# Altium PCB loaptrung.PcbDoc
Units mm, origin at the board's own origin, x right, y up, seen from the top; angles counter-clockwise.
Board outline 113.14 x 67.92 mm, 2 copper layers (Top Layer, Bottom Layer); 18 components, 19 nets, 82 pads, 2 vias.
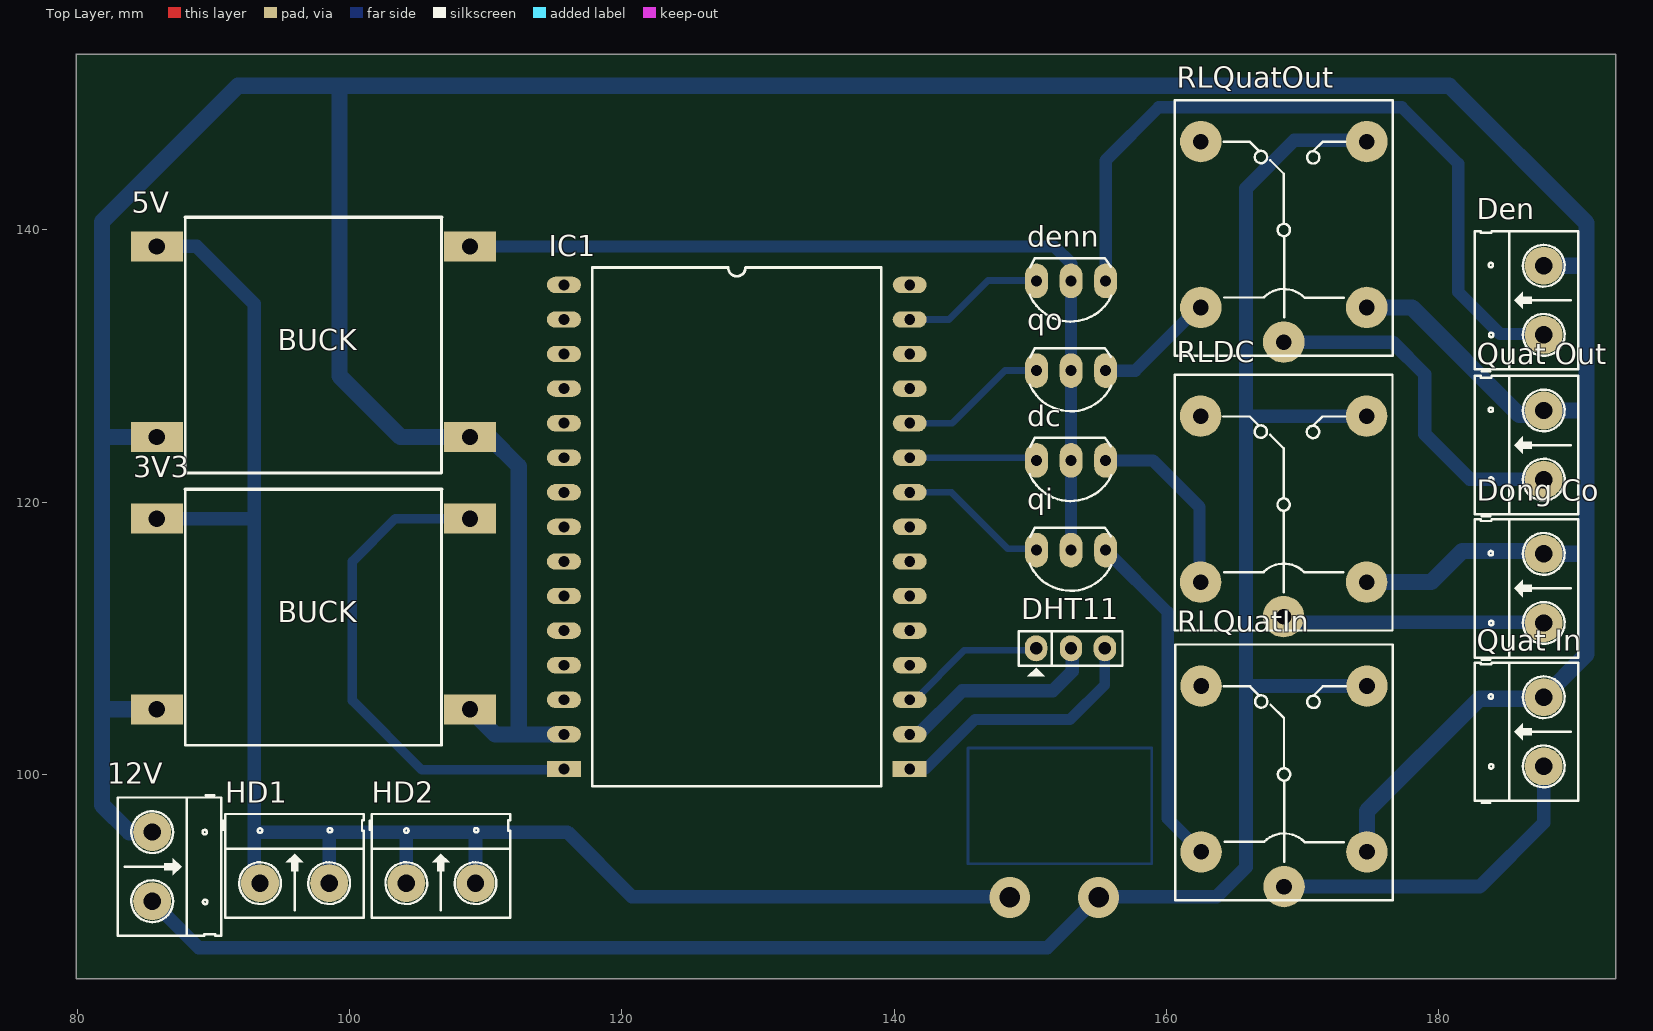
[diagram p0: Top Layer view]
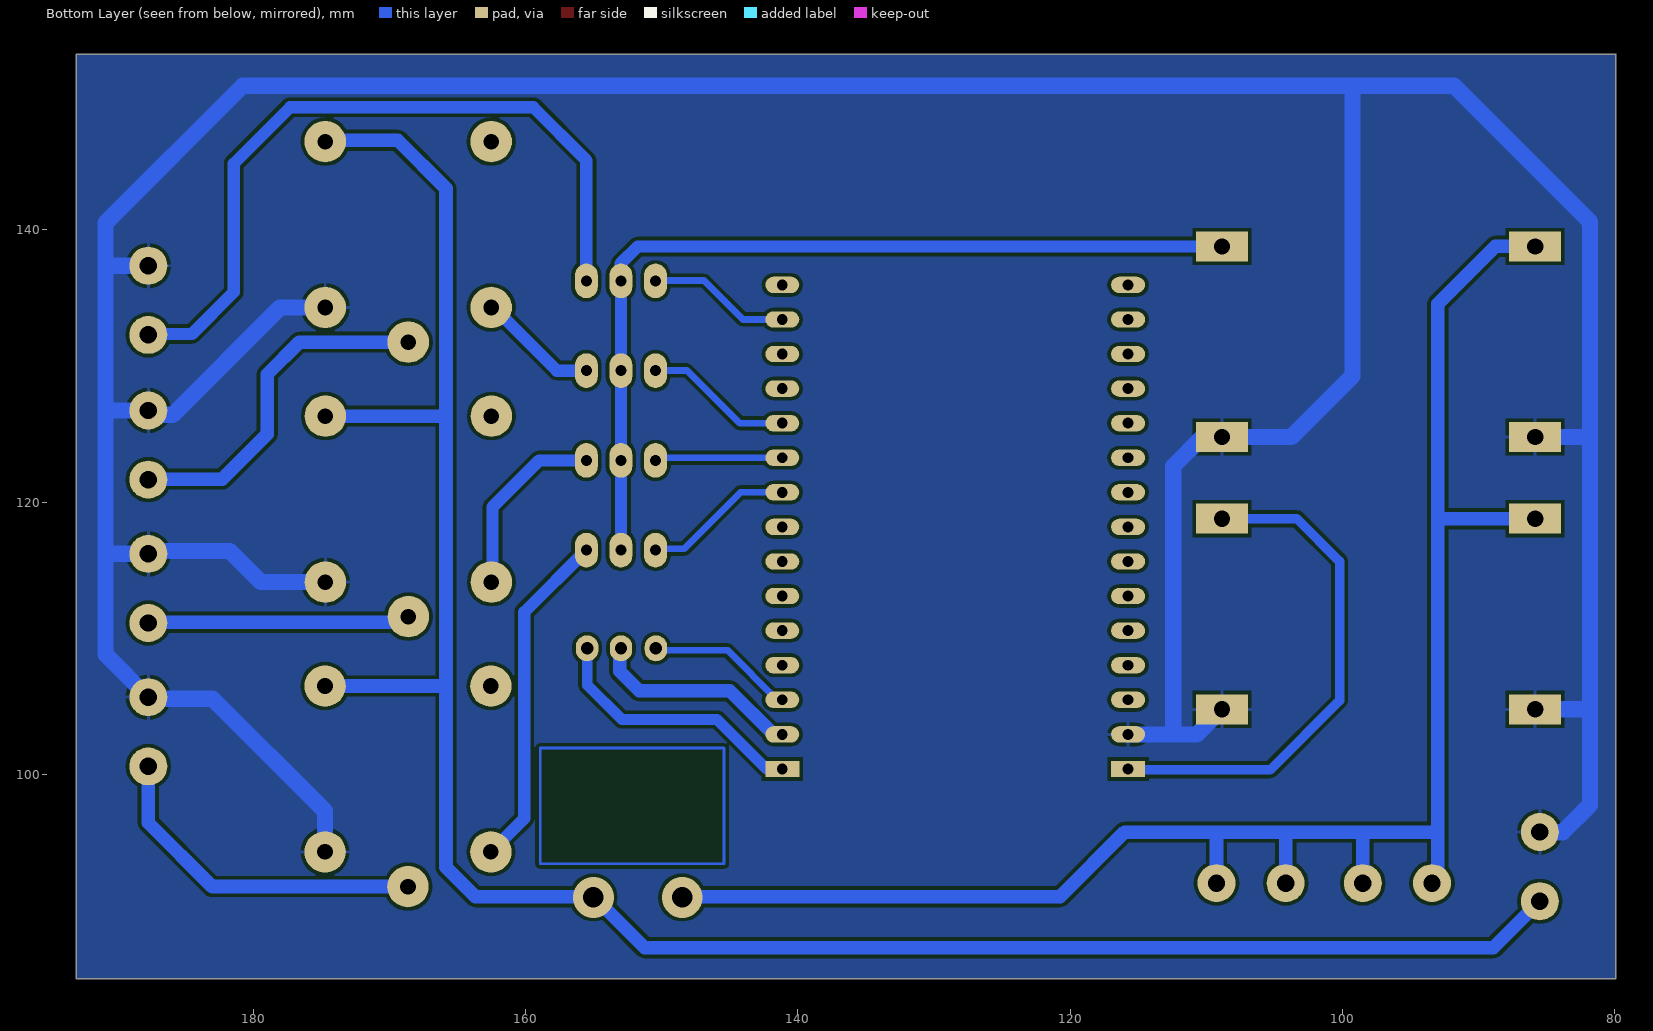
[diagram p1: Bottom Layer view, seen from below]
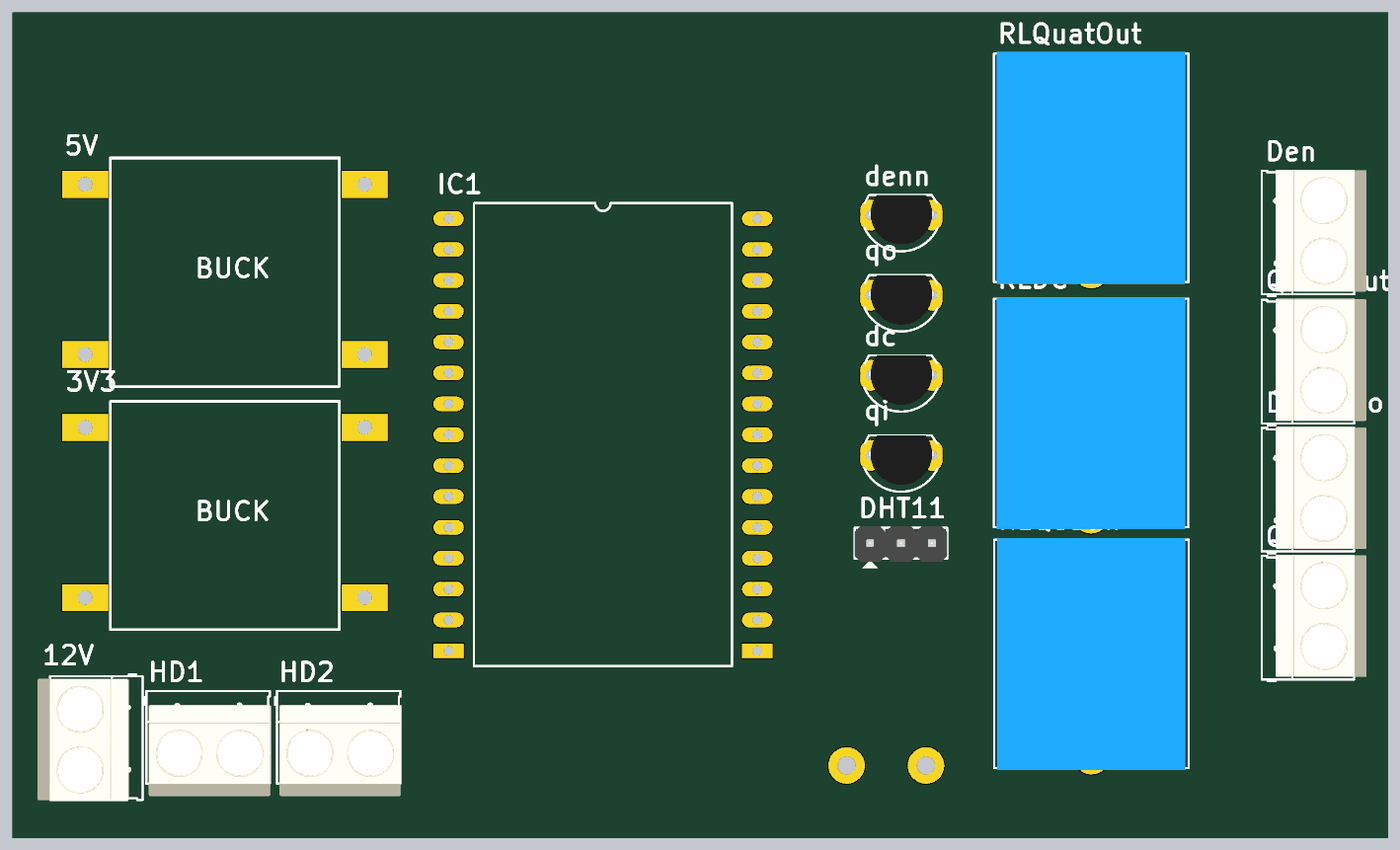
[diagram p2: 3D render of the assembled board from above, using the file's embedded part models]

## Layer stack, top to bottom
Top Layer: signal copper 0.0356
Dielectric: dielectric 0.32, FR-4, Dk 4.8
Bottom Layer: signal copper 0.0356

## Board outline
79.907,152.908 79.902,152.903 79.902,84.994 193.037,84.994 193.033,84.998 193.033,85.197 193.033,152.912 193.03,152.909 79.902,152.909 79.902,152.903

## Design rules (kind name [scope] priority, off if disabled: settings)
Clearance [All] p1: gap=0.254
PolygonConnect [All] p1: connectstyle=Relief reliefconductorwidth=0.254 reliefentries=4 polygonreliefangle="90 Angle"
RoutingCorners [All] p1: cornerstyle=45-Degree minsetback=3 maxsetback=3
RoutingLayers [All] p1: top layer_v5=FALSE bottom layer_v5=TRUE
RoutingVias [All] p1: holewidth=0.711 width=1.27 viastyle="Through Hole" minholewidth=0.711 minwidth=1.27 maxholewidth=0.711 maxwidth=1.27
SilkscreenOverComponentPads SilkToSolderMaskClearance [IsPad] p1: minsilkscreentomaskgap=0.254
SolderMaskExpansion [All] p1: expansion=0.102
TestPointUsage FabricationTestPointUsage [All] p1: valid=0 allowmultiple=FALSE
Testpoint FabricationTestpoint [(IsPad And (OnTopLayer Or OnBottomLayer))] p1: side=3 testpointundercomponent=TRUE minsize=1.016 maxsize=2.54 preferedsize=1.524 minholesize=0 maxholesize=1.016 preferedholesize=0.813 testpointgrid=0.025 style=297 order=0123456789
Width GND [InNet('GND')] p1: maxlimit=1 minlimit=1 preferedwidth=1
Width 5V [InNet('5V')] p2: maxlimit=0.9 minlimit=0.9 preferedwidth=0.9
Width 3V3 [InNet('3V3')] p3: maxlimit=0.7 minlimit=0.7 preferedwidth=0.7
Width [All] p4: maxlimit=0.5 minlimit=0.5 preferedwidth=0.5
21 further rules are at their usual default settings.

## Components (designator, comment, footprint, x,y, rotation, side; value= is the part's Value field where it differs from the comment)
3V3 "BUCK" "buck - duplicate1" 85.844,118.772 r0 top
5V "BUCK" "buck - duplicate1" 85.844,138.772 r0 top
12V "Header 2" HED2 85.5,95.75 r270 top
dc "C1815" QTO-92 153.004,123.057 r180 top
Den "Header 2" HED2 187.728,132.278 r90 top
denn "C1815" QTO-92 153.004,136.243 r180 top
DHT11 "Jumper 3" JP3 152.975,109.25 r0 top
"Dong Co" "Header 2" HED2 187.728,111.111 r90 top
HD1 "Header 2" HED2 93.42,92 r0 top
HD2 "Header 2" HED2 104.17,92 r0 top
IC1 "ESP32_DEVKITV1" "ESP32_DEVKITV1 - duplicate1" 115.75,135.95 r0 top
qi "C1815" QTO-92 153.004,116.464 r180 top
qo "C1815" QTO-92 153.004,129.65 r180 top
"Quat In" "Header 2" HED2 187.728,100.578 r90 top
"Quat Out" "Header 2" HED2 187.728,121.643 r90 top
RLDC "Relay 10A/12V" RL_SPDT_10A 168.618,111.578 r90 top
RLQuatIn "Relay 10A/12V" RL_SPDT_10A 168.648,91.75 r90 top
RLQuatOut "Relay 10A/12V" RL_SPDT_10A 168.632,131.75 r90 top

## Footprints (in the part's own frame and the unit in brackets; to place one, negate y for a bottom-side part, rotate by r counter-clockwise, add the part's x,y. Pads: shape width x height; smd on the part's side, far side on the other; paste and mask are expansions set on the pad)
"buck - duplicate1" [mm]
  rect 3.8x2.2 hole 1.2: 1(0,0) 2(0,-14) 3(23,-14) 4(23,0)
  silkscreen extent 2.08,-16.64 20.92,2.16
"ESP32_DEVKITV1 - duplicate1" [mm]
  oval 2.5x1.2 hole 0.8: 1(0,0) 2(0,-2.54) 3(0,-5.08) 4(0,-7.62) 5(0,-10.16) 6(0,-12.7) 7(0,-15.24) 8(0,-17.78) 9(0,-20.32) 10(0,-22.86) 11(0,-25.4) 12(0,-27.94) 13(0,-30.48) 14(0,-33.02) 17(25.4,-33.02) 18(25.4,-30.48) 19(25.4,-27.94) 20(25.4,-25.4) 21(25.4,-22.86) 22(25.4,-20.32) 23(25.4,-17.78) 24(25.4,-15.24) 25(25.4,-12.7) 26(25.4,-10.16) 27(25.4,-7.62) 28(25.4,-5.08) 29(25.4,-2.54) 30(25.4,0)
  rect 2.5x1.2 hole 0.8: 15(0,-35.56)
  rect 2.5x1.2 hole 0.8 mask+0.102: 16(25.4,-35.56)
  silkscreen extent 2.08,-36.83 23.32,1.27
HED2 [mil] "Header 2, 2 pin, hight 300mil, Pin to Pin 200, Colour Green"
  round 110 hole 50: 1(0,0) 2(200,0)
  silkscreen extent -106,-100 300,200, body extent -92,-140 302,155, height 394
JP3 [mil] "Jumper 3"
  oval 65x75 hole 36: 1(-100,0) 2(1,0) 3(99,0)
  silkscreen extent -150,-81 150,50, body extent -150,-60 150,55, height 355
QTO-92 [mil] "TO-92"
  oval 66x100 hole 32: 1(-100,0) 2(0,0) 3(100,0)
  silkscreen extent -117,-65 120,118, body extent -109,-66 109,95, height 245
RL_SPDT_10A [mil] "Relay SPDT, 5 pin, 10A,W 650mil, L 800mil, H 800mil"
  round 120 hole 45: 1(0,0) 2(580,240) 3(580,-240) 4(100,-240) 5(100,240)
  silkscreen extent -40,-315 700,315, body extent -46,-304 706,306, height 602

## Part data
12V Den "Dong Co" HD1 HD2 "Quat In" "Quat Out": library part Hed2, "Header 2 (Green)"
dc denn qi qo: "NPN 600mW, ECB"
DHT11: library part JP3
RLDC RLQuatIn RLQuatOut: library part "Relay 1", "Relay SPDT,10A - 12VDC 5 Pin"

## Via types
v1: diameter 3, hole 1.5, Top Layer to Bottom Layer, 2 vias

## Nets (pads, with @x,y where several pads share a name; then routed paths per layer and width w, separated by ;. In a path a pad name is that pad's centre, name@x,y a point inside that pad or via, vN(x,y) a via of type N, cw(c..) or ccw(c..) an arc to the next point about the centre after c; other vN are vias at no path point)
3V3: 3V3.4 IC1.15 | length 37.9
  Bottom Layer w0.7: 3V3.4 103.343,118.772 100.21,115.639 100.21,105.418 105.295,100.333 IC1.15@115.813,100.333
5V: 5V.4 dc.2 denn.2 qi.2 qo.2 | length 65.6
  Bottom Layer w0.9: 5V.4 151.768,138.772 153.029,137.511 denn.2@153.029,136.414 ; qi.2@152.887,116.468 153.004,116.585 dc.2 qo.2 denn.2
12V: 12V.2 RLDC.3 RLQuatIn.3 RLQuatOut.3 | length 161.9
  Bottom Layer w1: 12V.2 88.92,87.25 151.25,87.25 155,91 163.691,91 165.857,93.166 165.857,136.44 ; 165.854,136.44 165.857,136.44 ; 165.891,126.438 166.019,126.31 RLDC.3 ; 165.952,106.444 165.99,106.482 RLQuatIn.3 ; RLQuatOut.3@174.507,146.579 169.402,146.579 165.857,143.034 165.857,136.44
  other v1: 155.031,90.954
12VV: 3V3.1 5V.1 HD1.1 HD1.2 HD2.1 HD2.2 | length 127.6
  Bottom Layer w1: 3V3.1 92.912,118.772 ; 5V.1@85.852,138.789 88.762,138.789 93,134.551 93,95.75 ; HD1.1@93.5,92 93,92.5 93,95.75 ; HD1.2 98.5,95.75 ; HD2.1 104.17,95.67 104.25,95.75 ; HD2.2 109.25,95.5 109,95.75 ; v1@148.5,91 120.75,91 116,95.75 109,95.75 ; 93,95.75 98.5,95.75 ; 98.5,95.75 104.25,95.75 ; 104.25,95.75 109,95.75
  other v1: 148.5,90.954
GND: 3V3.2 3V3.3 5V.2 5V.3 12V.1 "Dong Co.2" "Quat In.2" "Quat Out.2" Den.2 IC1.14 RLDC.4 RLQuatIn.4 RLQuatOut.4 | length 332.1
  Bottom Layer w1.2: 81.88,124.82 81.928,124.772 5V.2 ; 81.922,104.772 3V3.2 ; 12V.1 83.805,95.75 81.815,97.74 81.815,140.598 85.128,143.911 91.799,150.582 180.793,150.582 190.876,140.499 190.876,126.723 ; 99.095,150.38 99.254,150.221 99.254,143.079 99.254,129.259 103.741,124.772 5V.3 110.286,124.772 112.433,122.625 112.433,103.158 ; 3V3.3 110.691,102.925 IC1.14@115.808,102.925 ; RLDC.4 179.457,114.118 181.736,116.397 187.771,116.397 ; RLQuatOut.4 178.047,134.29 185.919,126.418 187.697,126.418 ; RLQuatIn.4 174.744,97.295 183.004,105.555 187.619,105.555 ; 187.315,105.251 187.619,105.555 ; 187.728,116.191 190.527,116.191 190.571,116.147 ; 187.728,126.723 190.876,126.723 ; Den.2 190.604,137.358 190.614,137.368 ; 187.619,105.555 190.876,108.812 190.876,126.723
Netdc_1: dc.1 RLDC.5 | length 13.8
  Bottom Layer w0.9: dc.1 159.028,123.057 162.444,119.641 RLDC.5@162.444,114.114
Netdc_3: dc.3 IC1.25 | length 9.8
  Bottom Layer w0.5: IC1.25 IC1.25@141.301,123.25 ; IC1.25@141.184,123.367 IC1.25@141.301,123.25 ; IC1.25@141.326,123.225 IC1.25@141.301,123.25 ; dc.3@150.703,123.219 150.672,123.25 IC1.25@141.301,123.25
NetDen_1: Den.1 denn.1 | length 54.9
  Bottom Layer w0.9: denn.1 155.544,145.094 159.449,148.999 177.299,148.999 181.445,144.853 181.445,135.42 184.517,132.348 Den.1@187.589,132.348
Netdenn_3: denn.3 IC1.29 | length 10.7
  Bottom Layer w0.5: IC1.29 144.045,133.41 146.908,136.273 denn.3@150.703,136.273
NetDHT11_1: DHT11.1 IC1.18 | length 11
  Bottom Layer w0.5: IC1.18@141.038,105.469 141.54,105.469 145.184,109.113 150.298,109.113 DHT11.1
NetDHT11_2: DHT11.2 IC1.17 | length 15.7
  Bottom Layer w1: IC1.17 141.801,102.93 145.005,106.134 151.666,106.134 153.093,107.561 153.093,109.143 DHT11.2@153.285,109.335
NetDHT11_3: DHT11.3 IC1.16 | length 19.4
  Bottom Layer w0.8: IC1.16 142.301,100.39 145.934,104.023 152.935,104.023 155.477,106.565 DHT11.3@155.477,109.117
"NetDong Co_1": "Dong Co.1" RLDC.1 | length 19.5
  Bottom Layer w1: RLDC.1 169.028,111.168 187.502,111.168 187.81,111.476
NetIC1_24: IC1.24 qi.3 | length 11.1
  Bottom Layer w0.5: IC1.24 144.215,120.71 148.364,116.561 qi.3@150.488,116.561
NetIC1_26: IC1.26 qo.3 | length 10.9
  Bottom Layer w0.5: IC1.26 144.277,125.79 148.15,129.663 qo.3@150.464,129.663
Netqi_1: qi.1 RLQuatIn.5 | length 25.1
  Bottom Layer w0.9: qi.1 160.111,111.897 160.111,96.753 RLQuatIn.5@162.608,94.256
Netqo_1: qo.1 RLQuatOut.5 | length 9.1
  Bottom Layer w0.9: qo.1 157.713,129.65 162.444,134.381 RLQuatOut.5@162.444,134.627
"NetQuat In_1": "Quat In.1" RLQuatIn.1 | length 25.3
  Bottom Layer w1: RLQuatIn.1 183.04,91.75 187.733,96.443 187.733,100.711
"NetQuat Out_1": "Quat Out.1" RLQuatOut.1 | length 26
  Bottom Layer w1: RLQuatOut.1 176.621,131.75 178.982,129.389 178.982,124.997 182.297,121.682 187.864,121.682
pads on no net: IC1.1 IC1.2 IC1.3 IC1.4 IC1.5 IC1.6 IC1.7 IC1.8 IC1.9 IC1.10 IC1.11 IC1.12 IC1.13 IC1.19 IC1.20 IC1.21 IC1.22 IC1.23 IC1.27 IC1.28 IC1.30 RLDC.2 RLQuatIn.2 RLQuatOut.2
copper on no net: | length 44
  Bottom Layer w0.2: 145.428,93.42 145.428,101.92 158.928,101.92 158.928,93.42 145.428,93.42

## Polygon pours and split planes (outlines as drawn)
GND on Bottom Layer "Bottom Layer-No Net" (solid, remove dead copper): 79.902,152.909 79.902,84.994 193.033,84.994 193.033,152.909